# EAGLE board car bluetooth v1.1 (EAGLE 9.5.2)
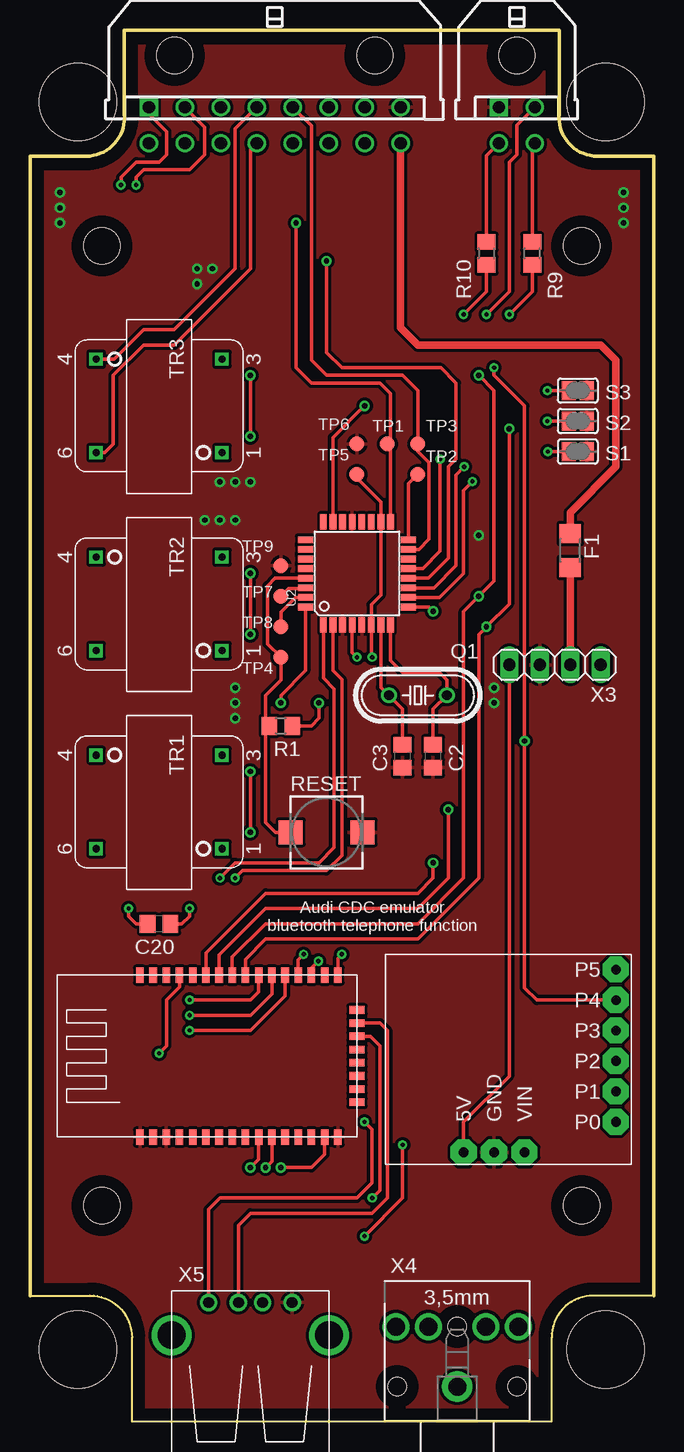
[diagram p0: board, top side]
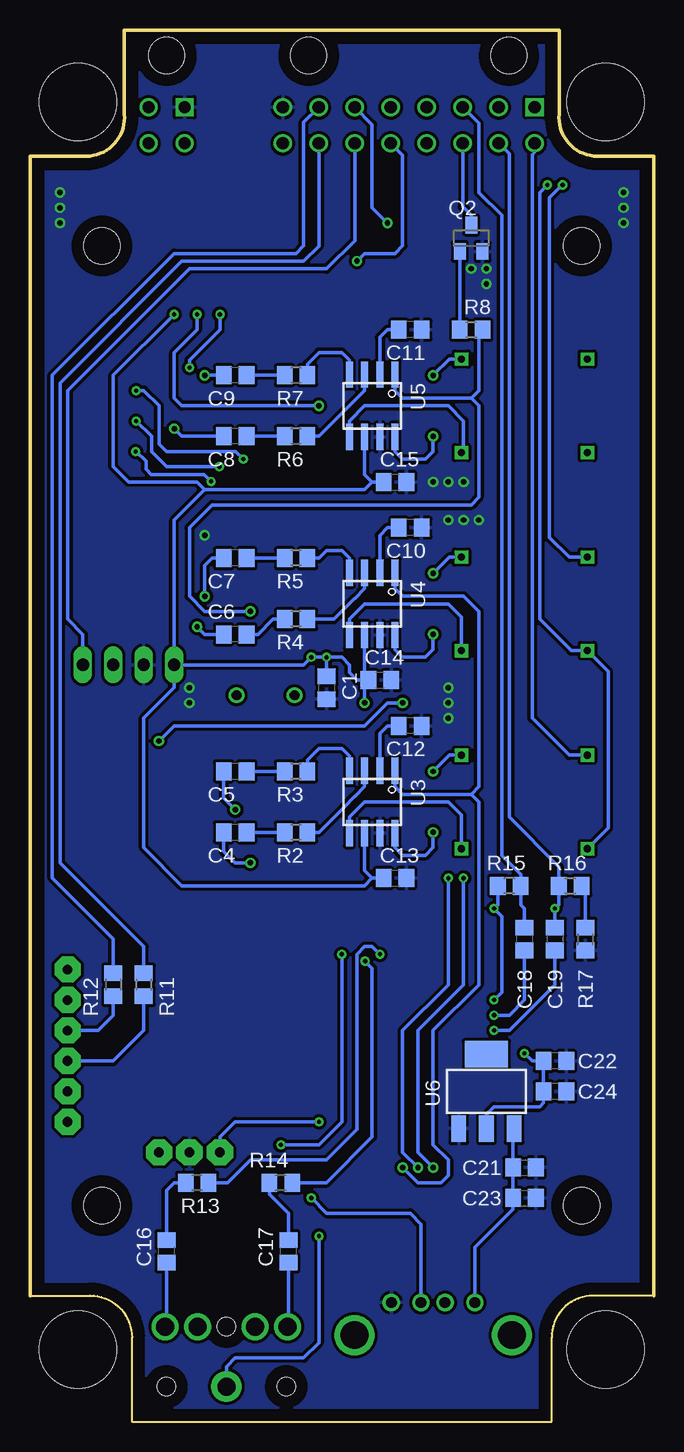
[diagram p1: board, bottom side, seen from below]

Size 52 x 116 mm. Coordinates in mm from the lower left corner, seen from the top.
Outline: 0,10.5 0,105.5 5,105.5 arc90 7.86,109 7.86,116 44.14,116 44.14,109 arc90 47,105.5 52,105.5 52,10.5 47,10.5 arc90 43.5,7 43.5,0 8.5,0 8.5,7 arc90 5,10.5 0,10.5
Copper layers (1*16): Top 0.035mm / dielectric 1.5mm / Bottom 0.035mm
Design rules "default": minimum track width 6mil, minimum drill 0.35mm, track to track 6mil, track to pad 6mil, pad to pad 6mil, via to via 6mil, smd to smd 6mil, copper to edge 40mil, drill to drill 6mil, minimum pad ring 10mil, minimum via ring 8mil, stop-mask expansion 4mil, vias tented up to drill 0mil, thermal gap 10mil
Holes 3 mm at 6,18 46,18 46,98 6,98
Holes 6.45 mm at 4,6 48,6 48,110 4,110

## Footprints (pad centres in the part's own frame; a part is rotated, then mirrored left to right if it is on the bottom)
C0805 = smd 1.3 x 1.5: 1 -0.95,0; 2 0.95,0
R1206 = smd 1.6 x 1.803: 1 -1.422,0; 2 1.422,0
HC49/S = drill 0.813: 1 -2.413,0; 2 2.413,0
SOT23 = smd 1 x 1.4: 1 -0.95,-1.1; 2 0.95,-1.1; 3 0,1.1
R0805 = smd 1.3 x 1.5: 1 -0.95,0; 2 0.95,0
PUSHBUTTON_SMD_SJ = smd 2 x 2: P$1 3,0; P$2 -3,0
SJ = smd 1.168 x 1.6: 1 -0.762,0; 2 0.762,0
B1,27 = smd 1.27 x 1.27: TP 0,0
EI14 = drill 0.6 square: P1 3.9,5.25; P3 -3.9,5.25; P4 -3.9,-5.25; P6 3.9,-5.25
40PIN_BOARD = smd 1.27 x 0.635: AGND 13.5,18.1; AUDIO_LN 13.5,9.3; AUDIO_LP 13.5,10.4; AUDIO_RN 13.5,12.6; AUDIO_RP 13.5,11.5; GND 0,18.1; GND1 0,15.9; GND2 0,1.6; GND3 13.5,1.6; GPIO3 13.5,2.7; GPIO4 0,12.6; GPIO5 0,13.7; GPIO8 0,3.8; GPIO9 0,2.7; GPIO14 0,14.8; GPIO15 0,11.5; LIN_L 13.5,4.9; LIN_R 13.5,3.8; MIC_NA 13.5,6; MIC_NP 13.5,7.1; NC 0,10.4; NC1 0,9.3; RF 0,17; RXD 0,7.1; TXD 0,8.2; USBNA 0,6; USBPA 0,4.9; V2MICBIAS 13.5,8.2; VBAT 13.5,14.8; VCC3IOA 13.5,17; VCCSYS 13.5,15.9; VUSB 13.5,13.7 | smd 0.635 x 1.27: GPIO2 10.6,0; GPIO10 5.1,0; GPIO11 7.3,0; GPIO12 4,0; GPIO13 6.2,0; NC2 2.9,0; USB_DN 9.5,0; USB_DP 8.4,0
TQFP32-08 = smd 1.27 x 0.559: 1 -4.293,2.8; 2 -4.293,2; 3 -4.293,1.2; 4 -4.293,0.4; 5 -4.293,-0.4; 6 -4.293,-1.2; 7 -4.293,-2; 8 -4.293,-2.8; 17 4.293,-2.8; 18 4.293,-2; 19 4.293,-1.2; 20 4.293,-0.4; 21 4.293,0.4; 22 4.293,1.2; 23 4.293,2; 24 4.293,2.8 | smd 0.559 x 1.27: 9 -2.8,-4.293; 10 -2,-4.293; 11 -1.2,-4.293; 12 -0.4,-4.293; 13 0.4,-4.293; 14 1.2,-4.293; 15 2,-4.293; 16 2.8,-4.293; 25 2.8,4.293; 26 2,4.293; 27 1.2,4.293; 28 0.4,4.293; 29 -0.4,4.293; 30 -1.2,4.293; 31 -2,4.293; 32 -2.8,4.293
SO8 = smd 0.6 x 2.2: 1 -1.905,-2.6; 2 -0.635,-2.6; 3 0.635,-2.6; 4 1.905,-2.6; 5 1.905,2.6; 6 0.635,2.6; 7 -0.635,2.6; 8 -1.905,2.6
SOT223 = smd 1.219 x 2.235: 1 -2.311,-3.099; 2 0,-3.099; 3 2.311,-3.099 | smd 3.6 x 2.2: TAB 0,3.099
DIGISPARK = drill 0.8 pad 2.184 octagon: 5V 13.97,16.51; GND 11.43,16.51; P0 1.27,13.97; P1 1.27,11.43; P2 1.27,8.89; P3 1.27,6.35; P4 1.27,3.81; P5 1.27,1.27; VIN 8.89,16.51
43045-0400 = drill 1.02 square: P$1 1.5,4.32 | drill 1.02: P$2 -1.5,4.32; P$3 1.5,7.32; P$4 -1.5,7.32 | hole 3: 0,0
43045-1600 = drill 1.02 square: P$1 10.5,4.32 | drill 1.02: P$2 7.5,4.32; P$3 4.5,4.32; P$4 1.5,4.32; P$5 -1.5,4.32; P$6 -4.5,4.32; P$7 -7.5,4.32; P$8 -10.5,4.32; P$9 10.5,7.32; P$10 7.5,7.32; P$11 4.5,7.32; P$12 1.5,7.32; P$13 -1.5,7.32; P$14 -4.5,7.32; P$15 -7.5,7.32; P$16 -10.5,7.32 | hole 3: 8.35,0; -8.35,0
1X04 = drill 1.016 long: 1 -3.81,0; 2 -1.27,0; 3 1.27,0; 4 3.81,0
STX3100 = drill 1.5 pad 2.54: 1 2.7,-0.1 | drill 1.5: 2 7.7,5; 3 7.7,2.3; 4 7.7,-2.5; 5 7.7,-5.2 | hole 1.5: 2.7,4.9; 2.7,-5.1; 7.7,-0.1
USB-A-H = drill 0.914: D+ 2.718,-1.003; D- 2.718,1.003; GND 2.718,-3.493; VBUS 2.718,3.493 | drill 2.311: P$5 0,-6.566; P$6 0,6.566

## Placement (x,y rotation side)
C1  100n  [C0805]  27.27,61.17 270 bottom
C2  22p  [C0805]  33.62,55.46 90 top
C3  22p  [C0805]  31.08,55.46 90 top
C4  100n  [C0805]  34.89,49.11 180 bottom
C5  100n  [C0805]  34.89,54.19 180 bottom
C6  100n  [C0805]  34.89,65.62 180 bottom
C7  100n  [C0805]  34.89,71.97 180 bottom
C8  100n  [C0805]  34.89,82.13 180 bottom
C9  100n  [C0805]  34.89,87.21 180 bottom
C10  1u  [C0805]  20.29,74.51 180 bottom
C11  1u  [C0805]  20.29,91.02 180 bottom
C12  1u  [C0805]  20.29,58 180 bottom
C13  1u  [C0805]  21.55,45.3 0 bottom
C14  1u  [C0805]  22.82,61.81 0 bottom
C15  1u  [C0805]  21.55,78.32 0 bottom
C16  1u  [C0805]  40.61,14.19 90 bottom
C17  1u  [C0805]  30.45,14.19 90 bottom
C18  1u  [C0805]  10.76,40.22 270 bottom
C19  1u  [C0805]  8.22,40.22 270 bottom
C20  1u  [C0805]  10.76,41.49 180 top
C21  100n  [C0805]  10.76,21.17 0 bottom
C22  100n  [C0805]  8.22,30.06 180 bottom
C23  1u  [C0805]  10.76,18.63 0 bottom
C24  1u  [C0805]  8.22,27.52 180 bottom
F1  [R1206]  45.05,72.61 270 top
Q1  [HC49/S]  32.35,60.54 180 top
Q2  BC847  [SOT23]  15.21,98.64 0 bottom
R1  10k  [R0805]  20.92,58 0 top
R2  12k  [R0805]  29.81,49.11 180 bottom
R3  12k  [R0805]  29.81,54.19 180 bottom
R4  12k  [R0805]  29.81,66.89 180 bottom
R5  12k  [R0805]  29.81,71.97 180 bottom
R6  12k  [R0805]  29.81,82.13 180 bottom
R7  12k  [R0805]  29.81,87.21 180 bottom
R8  10k  [R0805]  15.21,91.02 0 bottom
R9  10k  [R0805]  41.88,97.37 90 top
R10  10k  [R0805]  38.06,97.37 270 top
R11  10k  [R0805]  42.51,36.41 270 bottom
R12  10k  [R0805]  45.05,36.41 270 bottom
R13  20k  [R0805]  38.06,19.9 180 bottom
R14  20k  [R0805]  31.08,19.9 180 bottom
R15  1,2k  [R0805]  12.03,44.66 180 bottom
R16  1,2k  [R0805]  6.95,44.66 0 bottom
R17  0  [R0805]  5.68,40.22 270 bottom
RESET  [PUSHBUTTON_SMD_SJ]  24.73,49.11 0 top
S1  [SJ]  45.69,80.86 180 top
S2  [SJ]  45.69,83.4 180 top
S3  [SJ]  45.69,85.94 180 top
TP1  TPB1,27  [B1,27]  29.81,81.5 0 top
TP2  TPB1,27  [B1,27]  32.35,78.95 0 top
TP3  TPB1,27  [B1,27]  32.35,81.5 0 top
TP4  TPB1,27  [B1,27]  20.92,63.72 0 top
TP5  TPB1,27  [B1,27]  27.27,78.95 0 top
TP6  TPB1,27  [B1,27]  27.27,81.5 0 top
TP7  TPB1,27  [B1,27]  20.92,68.8 0 top
TP8  TPB1,27  [B1,27]  20.92,66.25 180 top
TP9  TPB1,27  [B1,27]  20.92,71.34 0 top
TR1  AUDIO_R  [EI14]  10.76,51.65 270 top
TR2  AUDIO_L  [EI14]  10.76,68.16 270 top
TR3  AUDIO_MIC  [EI14]  10.76,84.67 270 top
U1  BK3266_BOARD  [40PIN_BOARD]  27.27,23.71 90 top
U2  MEGA328P  [TQFP32-08]  27.27,70.7 90 top
U3  HT6872  [SO8]  23.46,51.65 180 bottom
U4  HT6872  [SO8]  23.46,68.16 180 bottom
U5  HT6872  [SO8]  23.46,84.67 180 bottom
U6  AMS1117-3.3  [SOT223]  13.94,27.52 0 bottom
U$7  DIGISPARK  [DIGISPARK]  50.13,38.95 180 top
X1  [43045-0400]  40.61,113.88 180 top
X2  [43045-1600]  20.41,113.88 180 top
X3  [1X04]  43.78,63.08 180 top
X4  STEREOJACK  [STX3100]  35.52,0.22 90 top
X5  USB-A-H  [USB-A-H]  18.38,7.2 90 top

## Library data of the parts
C1-C24 = rcl; SPICEPREFIX: C
F1 RESET = adafruit
Q1 = crystal; OC_FARNELL: 1667008; OC_NEWARK: unknown
Q2 = transistor-npn
R1-R17 = rcl; SPICEPREFIX: R
S1-S3 = jumper
TP1-TP9 = testpad
TR1-TR3 = trafo EI14
U1 = BK3266
U2 = atmel; MPN: ATMEGA8-16AU; OC_FARNELL: 9171371; OC_NEWARK: 73M8863
U3-U5 = HT6872
U6 = lm1117
U$7 = digispark
X1 X2 = con-molex-micro-fit-3_0
X3 = pinhead
X4 = audio amplifier example
X5 = con-usb

## Nets
+3V3: C22.2 C24.2 U1.VBAT U6.2
+5V: C1.1 C13.1 C14.1 C15.1 C21.1 C23.1 R1.2 R9.1 TP5.TP U2.4 U2.6 U2.18 U3.6 U4.6 U5.6 U6.3 U$7.5V X3.4 X5.VBUS
+12V: F1.1 X2.P$16
AGND: R16.2 R17.1
ANALOG_BUTTON: U2.23 X1.P$2
AUDIO_GND: TR1.P6 TR2.P6 X2.P$2
AUDIO_LN: C6.2 C8.2 U1.AUDIO_LN
AUDIO_LP: C7.2 C9.2 U1.AUDIO_LP
AUDIO_OUT_L: TR2.P4 X2.P$1
AUDIO_OUT_R: TR1.P4 X2.P$9
AUDIO_RN: C4.2 U1.AUDIO_RN
AUDIO_RP: C5.2 U1.AUDIO_RP
BT_RX: U1.TXD U2.1
BT_TX: U1.RXD U2.2
CLOCK: TP1.TP U2.17 X2.P$6
DATA_IN: TP3.TP U2.15 X2.P$5
DATA_OUT: U2.12 X2.P$13
GND: C1.2 C2.1 C3.1 C10.1 C11.1 C12.1 C13.2 C14.2 C15.2 C21.2 C22.1 C23.2 C24.1 Q2.2 R17.2 RESET.P$1 S1.1 S2.1 S3.1 TP6.TP TP9.TP U1.GND U1.GND1 U1.GND2 U2.3 U2.5 U2.21 U3.7 U4.7 U5.7 U6.1 U$7.GND X1.P$1 X2.P$8 X3.3 X5.GND
IGNITION: X2.P$14 X3.1
MIC_BIAS: C20.1 R15.2 U1.V2MICBIAS
MIC_GND: C19.1 C20.2 R16.1 X2.P$10
MIC_IN: C18.1 R15.1 X2.P$3
MIC_N: C19.2 U1.MIC_NA
MIC_P: C18.2 U1.MIC_NP
MISO: TP2.TP U2.16
MODE_1: S1.2 U2.10
MODE_2: S2.2 U2.11
MODE_3: S3.2 U2.13
MUTE_AMP: U1.GPIO9 U3.1 U4.1
N$1: R14.1 U1.LIN_R
N$2: C3.2 Q1.2 U2.7
N$3: C2.2 Q1.1 U2.8
N$4: Q2.1 R8.1
N$5: TR2.P3 U4.8
N$6: TR2.P1 U4.5
N$7: TR3.P3 U5.8
N$8: TR3.P1 U5.5
N$9: TR1.P1 U3.5
N$10: R2.1 U3.3
N$11: R3.1 U3.4
N$12: R4.1 U4.3
N$13: R5.1 U4.4
N$14: R6.1 U5.3
N$15: R7.1 U5.4
N$16: C5.1 R3.2
N$17: C4.1 R2.2
N$18: C6.1 R4.2
N$19: C7.1 R5.2
N$20: C8.1 R6.2
N$21: C9.1 R7.2
N$22: R9.2 X1.P$4
N$23: R10.1 X1.P$3
N$24: R12.2 U$7.P3
N$25: R11.2 U$7.P2
N$26: F1.2 X3.2
N$27: U1.USB_DP X5.D+
N$28: C12.2 U3.2
N$29: C10.2 U4.2
N$30: C11.2 U5.2
N$31: U1.USB_DN X5.D-
N$32: R13.1 U1.LIN_L
N$33: TR1.P3 U3.8
N$34: C17.1 X4.2
N$35: C16.1 X4.5
N$36: C17.2 R14.2
N$37: C16.2 R13.2
N$38: U1.GND3 X4.1
RADIO_MUTE: Q2.3 X2.P$11
REMC_IN: R12.1 X2.P$7
REMC_OUT: R11.1 X2.P$15
REMOTE_IN: R10.2 U2.32 U$7.P4
RESET: R1.1 RESET.P$2 TP4.TP U2.29
RXD: TP7.TP U2.30
TEL_AUDIO_GND: TR3.P6 X2.P$12
TEL_AUDIO_OUT: TR3.P4 X2.P$4
TEL_ENABLE: R8.2 U2.9 U5.1
TXD: TP8.TP U2.31

## Tracks (layer width: path | path; a pad name or v marks a point on that pad's centre or on a via)
+3V3  (via drill 0.35)
  Top 0.305: U1.VBAT 12.47,36.22 11.39,35.14 11.39,31.33 v10.76,30.7
  Bottom 0.305: U6.2 13.94,25.62 13.3,26.25 9.49,26.25 9.17,26.57 C24.2 C22.2 10.12,30.06 v10.76,30.7
+5V  (via drill 0.35, 0.45)
  Top 0.305: X3.4 39.97,28.79 36.16,24.98 U$7.5V | v24.09,59.91 24.09,58.63 23.46,58 R1.2 | R9.1 41.88,94.19 v39.97,92.29 | v28.54,63.72 28.47,63.78 U2.6 28.47,68.09 29.27,68.89 U2.18 29.27,76.64 27.27,78.64 TP5.TP | U2.4 26.87,64.11 v27.27,63.72 | X5.VBUS 14.89,17.68 15.84,18.63 27.27,18.63 28.54,19.9 28.54,24.34 v27.91,24.98
  Bottom 0.305: U3.6 24.09,45.94 23.46,45.3 | U5.6 24.09,78.95 23.46,78.32 | 37.43,77.69 24.09,77.69 23.46,78.32 | X3.4 29.18,63.08 v28.54,63.72 v27.27,63.72 | 37.43,77.69 39.97,75.14 X3.4 | 23.46,45.3 C13.1 | C15.1 23.46,78.32 | 23.46,45.3 24.09,44.66 39.34,44.66 42.51,47.84 42.51,58.63 39.97,61.17 X3.4 | 37.43,77.69 38.06,78.32 43.78,78.32 45.05,79.59 45.05,87.21 v39.97,92.29 | v27.27,63.72 26,63.72 25.36,63.08 25.36,62.45 24.73,61.81 C14.1 | C1.1 v27.27,63.72 | C14.1 24.09,61.49 v24.09,59.91 | C14.1 24.09,62.13 U4.6 | U$7.5V 36.16,23.71 34.89,24.98 v27.91,24.98 | 12.03,18.63 C23.1 | 11.71,18.31 C23.1 | C23.1 C21.1 11.71,24.34 U6.3 | C23.1 11.71,17.68 14.89,14.5 X5.VBUS
+12V
  Top 0.61: X2.P$16 30.91,91.19 32.35,89.75 47.59,89.75 48.86,88.48 48.86,79.59 45.05,75.78 F1.1
AGND
  Bottom 0.305: R17.1 5.68,44.34 R16.2
ANALOG_BUTTON  (via drill 0.35, 0.45)
  Top 0.305: U2.23 25.27,82.03 v27.91,84.67 | v38.06,92.29 39.97,94.19 39.97,104.99 40.61,105.62 40.61,108.06 X1.P$2
  Bottom 0.305: v27.91,84.67 39.34,84.67 39.97,85.31 39.97,89.11 38.06,91.02 v38.06,92.29
AUDIO_GND  (via drill 0.35)
  Top 0.305: v8.86,103.09 8.86,103.72 9.49,104.35 13.3,104.35 14.57,105.62 14.57,107.9 X2.P$2
  Bottom 0.305: TR1.P6 3.77,49.48 3.77,62.52 TR2.P6 6.86,64.26 9.49,66.89 9.49,102.45 v8.86,103.09
AUDIO_LN  (via drill 0.45)
  Top 0.305: v39.97,82.77 39.97,68.16 v38.06,66.25 37.43,65.62 37.43,45.3 32.35,40.22 19.65,40.22 17.97,38.54 U1.AUDIO_LN
  Bottom 0.305: v39.97,82.77 39.34,82.13 C8.2 | v38.06,66.25 37.43,65.62 C6.2
AUDIO_LP  (via drill 0.45)
  Top 0.305: v37.43,87.21 38.7,85.94 38.7,70.06 v37.43,68.8 36.16,67.53 36.16,45.3 32.35,41.49 19.65,41.49 16.87,38.71 U1.AUDIO_LP
  Bottom 0.305: C9.2 v37.43,87.21 | 35.52,71.97 C7.2 36.8,71.97 37.43,71.34 v37.43,68.8
AUDIO_OUT_L  (via drill 0.35)
  Top 0.305: TR2.P4 5.42,71.97 | v7.59,103.09 7.59,103.72 8.86,104.99 10.76,104.99 11.39,105.62 11.39,107.53 9.91,109.01 X2.P$1
  Bottom 0.305: TR2.P4 7.04,72.06 8.67,73.69 8.67,102 v7.59,103.09
AUDIO_OUT_R
  Bottom 0.305: TR1.P4 7.04,55.55 10.12,58.63 10.12,105.62 9.91,105.84 X2.P$9
AUDIO_RN  (via drill 0.45)
  Top 0.305: U1.AUDIO_RN 14.67,39.05 19.65,44.03 32.35,44.03 33.62,45.3 v33.62,46.57
  Bottom 0.305: v33.62,46.57 34.89,46.57 35.84,47.52 C4.2
AUDIO_RP  (via drill 0.45)
  Top 0.305: U1.AUDIO_RP 15.77,38.88 19.65,42.76 32.35,42.76 34.89,45.3 v34.89,51.02
  Bottom 0.305: 36.16,53.87 C5.2 35.84,51.97 v34.89,51.02
BT_RX  (via drill 0.35, 0.45)
  Top 0.305: U2.1 24.47,61.96 25.36,61.07 25.36,47.84 24.09,46.57 17.11,46.57 v15.84,45.3 | U1.TXD 19.07,21.86 v18.38,21.17
  Bottom 0.305: v18.38,21.17 19.65,22.44 19.65,32.6 15.84,36.41 v15.84,45.3
BT_TX  (via drill 0.35, 0.45)
  Top 0.305: U2.2 25.27,62.6 26,61.87 26,47.21 24.73,45.94 17.74,45.94 v17.11,45.3 | U1.RXD 20.17,21.69 v19.65,21.17
  Bottom 0.305: v19.65,21.17 20.92,22.44 20.92,32.6 17.11,36.41 v17.11,45.3
CLOCK  (via drill 0.45)
  Top 0.305: v22.19,99.91 22.19,87.84 23.46,86.58 29.18,86.58 30.07,85.68 30.07,81.5 | 30.07,81.5 U2.17 | TP1.TP 30.07,81.5
  Bottom 0.305: v22.19,99.91 23.46,101.18 23.46,108.11 X2.P$6
DATA_IN
  Top 0.305: U2.15 32.45,72.7 33.29,73.55 33.29,79.92 32.35,80.86 TP3.TP 32.35,85.94 31.08,87.21 24.73,87.21 23.46,88.48 23.46,108.01 X2.P$5
DATA_OUT  (via drill 0.45)
  Top 0.305: U2.12 33.22,70.3 34.89,71.97 34.89,79.59 35.52,80.22 35.52,86.58 34.26,87.84 26,87.84 24.73,89.11 v24.73,96.73
  Bottom 0.305: v24.73,96.73 24.09,97.37 21.55,97.37 20.92,98 20.92,105.57 X2.P$13
GND  (via drill 0.45)
  other vias: 38.7,61.17 38.7,59.91 17.11,58.63 17.11,59.91 17.11,61.17 49.5,99.91 49.5,101.18 49.5,102.45 2.5,102.45 2.5,101.18 2.5,99.91 13.94,94.83 13.94,96.1 15.21,96.1 14.57,75.14 15.84,75.14 17.11,75.14 37.43,73.88 18.38,78.32 17.11,78.32 15.84,78.32
  pour Top (isolate 0.254): 8.22,115.61 43.78,115.61 43.78,108.8 46.32,106.26 51.4,106.26 51.4,9.74 46.32,9.74 43.78,7.2 43.78,0.39 8.22,0.39 8.22,7.2 5.68,9.74 0.6,9.74 0.6,106.26 5.68,106.26 8.22,108.8
  pour Bottom (isolate 0.254): 0.6,108.99 0.6,7.01 7.22,0.39 44.78,0.39 51.4,7.01 51.4,108.99 44.78,115.61 7.22,115.61
IGNITION
  Bottom 0.305: X2.P$14 24.91,98.46 27.27,96.1 38.7,96.1 48.86,85.94 48.86,66.89 47.59,65.62 X3.1
MIC_BIAS  (via drill 0.35)
  Top 0.305: U1.V2MICBIAS 19.07,35.83 18.38,35.14 v13.3,35.14 | C20.1 12.66,41.49 13.3,42.12 v13.3,42.76
  Bottom 0.305: v13.3,35.14 12.66,35.77 12.66,42.12 v13.3,42.76 12.98,43.08 R15.2
MIC_GND  (via drill 0.35)
  Top 0.305: C20.2 8.86,41.49 8.22,42.12 v8.22,42.76
  Bottom 0.305: C19.1 v8.22,42.76 7.9,43.08 R16.1 | X2.P$10 12.03,105.68 12.03,50.38 7.9,46.25 R16.1 | R16.1 8.22,44.98
MIC_IN
  Bottom 0.305: X2.P$3 14.57,108.22 14.57,102.45 12.66,100.55 12.66,47.2 11.08,45.62 R15.1 11.08,43.08 10.76,42.76 C18.1
MIC_N  (via drill 0.35)
  Top 0.305: U1.MIC_NA 21.27,35.49 18.38,32.6 v13.3,32.6
  Bottom 0.305: v13.3,32.6 12.03,32.6 8.22,36.41 C19.2
MIC_P  (via drill 0.35)
  Top 0.305: U1.MIC_NP 20.17,35.66 18.38,33.87 v13.3,33.87
  Bottom 0.305: v13.3,33.87 12.03,33.87 10.76,35.14 C18.2
MISO
  Top 0.305: TP2.TP 31.56,78.17 U2.16
MODE_1  (via drill 0.35)
  Top 0.305: U2.10 34.16,68.7 36.16,70.7 36.16,77.62 v36.91,78.37 | v43.19,80.86 S1.2
  Bottom 0.305: v36.91,78.37 37.49,78.95 41.88,78.95 42.33,79.4 42.33,80.05 43.14,80.86 v43.19,80.86
MODE_2  (via drill 0.35)
  Top 0.305: U2.11 33.69,69.5 35.52,71.34 35.52,78.91 v36.21,79.59 | v43.14,83.4 S2.2
  Bottom 0.305: v43.14,83.4 41.88,82.13 41.88,80.86 40.61,79.59 v36.21,79.59
MODE_3  (via drill 0.35)
  Top 0.305: U2.13 32.75,71.1 34.21,72.56 v34.21,80.22 | v43.14,85.94 S3.2
  Bottom 0.305: v34.21,80.22 34.84,80.86 40.61,80.86 41.24,81.5 41.24,84.67 42.51,85.94 v43.14,85.94
MUTE_AMP  (via drill 0.45)
  Top 0.305: U1.GPIO9 24.57,22.28 23.46,21.17 v20.92,21.17
  Bottom 0.305: 21.55,70.12 U4.1 21.55,69.43 20.92,68.8 15.84,68.8 14.57,67.53 14.57,52.92 15.21,52.28 | U3.1 21.55,52.92 20.92,52.28 15.21,52.28 | 15.21,52.28 14.57,51.65 14.57,36.41 18.38,32.6 18.38,23.08 17.11,21.8 17.11,20.53 17.74,19.9 19.65,19.9 v20.92,21.17
N$1  (via drill 0.35)
  Top 0.305: U1.LIN_R 23.47,37.8 v24.05,38.38
  Bottom 0.305: R14.1 27.27,19.9 23.46,23.71 23.46,37.79 v24.05,38.38
N$2
  Top 0.305: C3.2 31.08,59.4 Q1.2 29.27,61.21 U2.7
N$3
  Top 0.305: C2.2 33.62,59.4 Q1.1 34.76,61.81 34.13,62.45 31.08,62.45 30.07,63.45 U2.8
N$4
  Bottom 0.305: Q2.1 R8.1
N$5  (via drill 0.45)
  Top 0.305: v18.38,70.7 v18.38,65.62
  Bottom 0.305: TR2.P3 17.02,72.06 v18.38,70.7 | U4.8 21.55,64.35 20.92,63.72 19.02,63.72 18.38,64.35 v18.38,65.62
N$6
  Bottom 0.305: U4.5 25.36,66.89 24.09,68.16 17.11,68.16 16.01,67.06 TR2.P1
N$7  (via drill 0.45)
  Top 0.305: v18.38,82.13 v18.38,87.21
  Bottom 0.305: TR3.P3 17.02,88.57 v18.38,87.21 | U5.8 21.55,80.86 20.92,80.22 19.02,80.22 18.38,80.86 v18.38,82.13
N$8
  Bottom 0.305: U5.5 25.36,83.4 24.09,84.67 17.11,84.67 15.84,83.4 15.84,80.94 TR3.P1
N$9
  Bottom 0.305: U3.5 25.36,50.38 24.09,51.65 17.11,51.65 16.01,50.55 TR1.P1
N$10
  Bottom 0.305: U3.3 24.09,52.92 24.91,52.11 24.92,52.11 25.82,51.2 25.82,51.19 27.91,49.11 R2.1
N$11
  Bottom 0.305: 25.36,54.83 U3.4 25.36,55.46 26,56.09 27.91,56.09 28.86,55.14 R3.1
N$12
  Bottom 0.305: U4.3 24.09,69.43 24.91,68.62 24.92,68.62 26.65,66.89 R4.1
N$13
  Bottom 0.305: U4.4 25.36,71.97 26,72.61 27.27,72.61 27.91,71.97 R5.1
N$14
  Bottom 0.305: 24.09,86.58 U5.3 24.09,85.94 27.91,82.13 R6.1
N$15
  Bottom 0.305: 25.36,87.84 U5.4 25.36,88.48 26,89.11 27.91,89.11 28.86,88.16 R7.1
N$16
  Bottom 0.305: R3.2 C5.1
N$17
  Bottom 0.305: C4.1 R2.2
N$18
  Bottom 0.305: C6.1 32.98,65.62 31.71,66.89 R4.2
N$19
  Bottom 0.305: R5.2 C7.1
N$20
  Bottom 0.305: C8.1 R6.2
N$21
  Bottom 0.305: R7.2 C9.1
N$22
  Top 0.305: X1.P$4 41.88,106.33 R9.2
N$23
  Top 0.305: X1.P$3 38.06,105.52 R10.1
N$24
  Bottom 0.305: U$7.P3 46.32,32.6 45.05,33.87 R12.2
N$25
  Bottom 0.305: R11.2 42.51,32.6 45.05,30.06 U$7.P2
N$26
  Top 0.61: X3.2 F1.2
N$27  (via drill 0.35)
  Top 0.305: U1.USB_DP 28.39,32.11 29.18,31.33 29.18,19.27 v28.54,18.63
  Bottom 0.305: v28.54,18.63 27.27,17.36 20.29,17.36 19.38,16.46 X5.D+
N$28
  Bottom 0.305: U3.2 22.82,57.37 22.19,58 C12.2
N$29
  Bottom 0.305: C10.2 22.19,74.51 22.82,73.88 U4.2
N$30
  Bottom 0.305: C11.2 22.19,91.02 22.82,90.38 U5.2
N$31
  Top 0.305: U1.USB_DN 29.2,33.21 29.81,32.6 29.81,18.63 28.54,17.36 18.38,17.36 17.38,16.36 X5.D-
N$32  (via drill 0.35)
  Top 0.305: U1.LIN_L 22.37,38.5 v22.82,38.95
  Bottom 0.305: R13.1 35.52,19.9 33.62,21.8 27.27,21.8 24.73,24.34 24.73,38.95 24.09,39.59 23.46,39.59 v22.82,38.95
N$33  (via drill 0.45)
  Top 0.305: v18.38,54.19 v18.38,49.11
  Bottom 0.305: 21.55,48.48 U3.8 21.55,47.84 20.92,47.2 19.02,47.2 18.38,47.84 v18.38,49.11 | TR1.P3 17.02,55.55 v18.38,54.19
N$34
  Bottom 0.305: C17.1 30.45,7.99 X4.2
N$35
  Bottom 0.305: C16.1 40.61,8.03 X4.5
N$36
  Bottom 0.305: C17.2 30.45,17.36 32.03,18.95 R14.2
N$37
  Bottom 0.305: R13.2 39.97,19.9 40.61,19.27 C16.2
N$38  (via drill 0.35)
  Top 0.305: U1.GND3 25.67,38.62 v26,38.95 | v31.08,23.08 31.08,18.63 v27.91,15.45
  Bottom 0.305: v26,38.95 26,24.98 27.91,23.08 v31.08,23.08 | v27.91,15.45 27.91,6.56 29.18,5.3 34.89,5.3 35.62,4.56 X4.1
RADIO_MUTE
  Bottom 0.305: X2.P$11 15.91,101.25 15.21,100.55 Q2.3
REMC_IN
  Bottom 0.305: R12.1 45.05,40.22 50.13,45.3 50.13,87.21 39.97,97.37 29.81,97.37 29.18,98 29.18,108.3 X2.P$7
REMC_OUT
  Bottom 0.305: R11.1 42.51,39.59 49.5,46.57 49.5,86.58 39.34,96.73 29.18,96.73 27.91,98 X2.P$15
REMOTE_IN  (via drill 0.35, 0.45)
  Top 0.305: U2.32 22.98,62.6 20.92,60.54 v20.92,59.91 | U$7.P4 42.26,35.14 41.24,36.16 v41.24,56.73 41.24,84.67 38.7,87.21 v38.7,87.84 | R10.2 38.06,94.19 v36.16,92.29
  Bottom 0.305: v20.92,59.91 22.19,59.91 24.09,58 39.97,58 v41.24,56.73 | v38.7,87.84 38.7,88.48 36.16,91.02 v36.16,92.29
RESET
  Top 0.305: U2.29 20.44,70.3 19.8,69.66 19.8,64.83 TP4.TP 20.92,61.81 19.65,60.54 19.65,58.32 R1.1 19.65,57.68 19.65,49.92 20.46,49.11 RESET.P$2
RXD
  Top 0.305: U2.30 22.91,69.43 21.55,69.43 TP7.TP
TEL_AUDIO_GND
  Top 0.305: X2.P$12 18.38,106.03 18.38,96.1 12.03,89.75 9.49,89.75 6.95,87.21 6.95,81.5 6.23,80.77 TR3.P6
TEL_AUDIO_OUT
  Top 0.305: TR3.P4 7.04,88.57 9.49,91.02 12.03,91.02 17.11,96.1 17.11,107.76 X2.P$4
TEL_ENABLE  (via drill 0.45)
  Top 0.305: v33.62,67.54 33.26,67.9 U2.9
  Bottom 0.305: U5.1 21.55,85.94 20.92,85.31 15.21,85.31 | 15.21,85.31 14.57,84.67 14.57,77.05 15.21,76.41 36.8,76.41 38.7,74.51 38.7,68.8 37.44,67.54 v33.62,67.54 | 15.21,85.31 14.57,85.94 14.57,90.7 R8.2
TXD
  Top 0.305: U2.31 22.15,68.7 20.92,67.47 TP8.TP

## Text on the board
tNames: Audi CDC emulator / bluetooth telephone function